# EAGLE board CT_schematic (EAGLE 7.6.0)

Size 100 x 80 mm. Coordinates in mm from the lower left corner, seen from the top.
Outline: 0,0 100,0 100,80 0,80 0,0
Copper layers (1*16): Top 0.035mm / dielectric 1.5mm / Bottom 0.035mm
Design rules "default": minimum track width 10mil, minimum drill 24mil, track to track 8mil, track to pad 8mil, pad to pad 8mil, via to via 8mil, smd to smd 8mil, copper to edge 40mil, drill to drill 8mil, minimum pad ring 10mil, minimum via ring 8mil, stop-mask expansion 4mil, vias tented up to drill 0mil, thermal gap 10mil

## Footprints (pad centres in the part's own frame; a part is rotated, then mirrored left to right if it is on the bottom)
C0603 = smd 0.8 x 0.8: 1 -0.762,0; 2 0.762,0
C0402 = smd 0.5 x 0.5: 1 -0.508,0; 2 0.508,0
C1210 = smd 1.2 x 2.5: 1 -1.524,0; 2 1.524,0
C1206 = smd 1.3 x 1.6: 1 -1.524,0; 2 1.524,0
R0603 = smd 0.8 x 0.8: 1 -0.762,0; 2 0.762,0
TSSOP14 = smd 0.35 x 1: 1 -1.95,-2.825; 2 -1.3,-2.825; 3 -0.65,-2.825; 4 0,-2.825; 5 0.65,-2.825; 6 1.3,-2.825; 7 1.95,-2.825; 8 1.95,2.825; 9 1.3,2.825; 10 0.65,2.825; 11 0,2.825; 12 -0.65,2.825; 13 -1.3,2.825; 14 -1.95,2.825
ABS07-32.768KHZ-7-T = smd 1.1 x 2.4: 1 -2.5,0; 2 0,0
ASFL1 = smd 1.7 x 1.5: 1 -1.27,-1.1; 2 1.27,-1.1; 3 1.27,1.1; 4 -1.27,1.1
SOIC-8_EP = smd 1.6 x 0.533: 1 -2.921,1.905; 2 -2.921,0.635; 3 -2.921,-0.635; 4 -2.921,-1.905; 5 2.921,-1.905; 6 2.921,-0.635; 7 2.921,0.635; 8 2.921,1.905 | smd 2.54 x 3.302: EPAD 0,0 | drill 0.406 pad 0.406: P$1 -0.508,0.635; P$2 0.381,0.635; P$3 -0.508,-0.635; P$4 0.381,-0.635
DFN8_2X3MC = smd 0.813 x 0.305: 1 -1.398,0.75; 2 -1.398,0.25; 3 -1.398,-0.25; 4 -1.398,-0.75; 5 1.398,-0.75; 6 1.398,-0.25; 7 1.398,0.25; 8 1.398,0.75 | smd 1.753 x 1.549: 9 0,0
JST-2-SMD = smd 1 x 4.6: 1 -1,-3.7; 2 1,-3.7 | smd 1.6 x 3.4: NC1 -3.4,1.5; NC2 3.4,1.5
FCI_10118193-0001LF = smd 0.4 x 1.35: 1 -1.3,2.675; 2 -0.65,2.675; 3 0,2.675; 4 0.65,2.675; 5 1.3,2.675 | smd 1.6 x 1.4: 6 -3.2,2.45; 7 3.2,2.45 | smd 1.9 x 1.9: 8 -1.2,0; 9 1.2,0 | hole 0.5: -3.3,0; 3.3,0
SON-6 = smd 0.55 x 0.3: 1 -0.355,0.5 | smd 0.52 x 0.3: 2 -0.37,0; 3 -0.37,-0.5; 4 0.37,-0.5; 5 0.37,0; 6 0.37,0.5
SW_4-1437565-2 = smd 1.4 x 2.1: 1 -2.23,4.55; 2 -2.23,-4.55; 3 2.23,4.55; 4 2.23,-4.55
LGM67K-G1J2-24-Z = smd 0.8 x 1.4: A -2,0; C 0,0
NC7SZ125M5X = smd 1.3 x 0.7: 1 -1.3,0.95; 2 -1.3,0; 3 -1.3,-0.95; 4 1.3,-0.95; 5 1.3,0.95
DUMMY_PACKAGE_85 = drill 0.3: 1 0,-1; 2 1.5,-1; 3 3,-1

## Placement (x,y rotation side)
C1  1e-07  [C0603]  -27.94,44.45 0 top  (outside the outline)
C2  1e-07  [C0603]  -31.75,44.45 0 top  (outside the outline)
C3  1e-07  [C0603]  -35.56,44.45 0 top  (outside the outline)
C4  1e-07  [C0603]  -39.37,44.45 0 top  (outside the outline)
C5  4.7e-06  [C0603]  -24.13,44.45 0 top  (outside the outline)
C6  1e-11  [C0402]  -26.67,49.53 0 top  (outside the outline)
C7  1e-11  [C0402]  -30.48,49.53 0 top  (outside the outline)
C8  1e-08  [C0402]  -34.29,49.53 0 top  (outside the outline)
C9  1e-05  [C1210]  -16.51,33.02 0 top  (outside the outline)
C10  1e-05  [C1210]  -22.86,33.02 0 top  (outside the outline)
C11  1e-05  [C1210]  -29.21,33.02 0 top  (outside the outline)
C12  1e-05  [C1210]  -35.56,33.02 0 top  (outside the outline)
C13  1e-07  [C0402]  -38.1,49.53 0 top  (outside the outline)
C14  1e-05  [C1206]  -41.91,33.02 0 top  (outside the outline)
C15  1e-05  [C1206]  -48.26,33.02 0 top  (outside the outline)
C16  1e-08  [C0402]  -41.91,49.53 0 top  (outside the outline)
R1  10000.0  [R0603]  -40.64,38.1 0 top  (outside the outline)
R2  1000.0  [R0603]  -43.18,44.45 0 top  (outside the outline)
R3  1600.5  [R0603]  -46.99,44.45 0 top  (outside the outline)
R4  4700.0  [R0603]  -50.8,44.45 0 top  (outside the outline)
R5  10000.0  [R0603]  -45.72,38.1 0 top  (outside the outline)
R6  4031.5447154472  [R0603]  -25.4,38.1 0 top  (outside the outline)
R7  2200.0  [R0603]  -15.24,49.53 0 top  (outside the outline)
R8  10000.0  [R0603]  -50.8,38.1 0 top  (outside the outline)
R9  10000.0  [R0603]  -15.24,44.45 0 top  (outside the outline)
R10  9100.0  [R0603]  -19.05,49.53 0 top  (outside the outline)
R11  680000.0  [R0603]  -30.48,38.1 0 top  (outside the outline)
R12  120000.0  [R0603]  -35.56,38.1 0 top  (outside the outline)
R13  2000.0  [R0603]  -22.86,49.53 0 top  (outside the outline)
R14  10000.0  [R0603]  -20.32,44.45 0 top  (outside the outline)
U1  STM32L021D4P6  [TSSOP14]  -44.45,16.51 0 top  (outside the outline)
U2  ABS07-32.768KHZ-7-T  [ABS07-32.768KHZ-7-T]  -27.94,25.4 0 top  (outside the outline)
U3  ASFL1-12MHZ-NCS  [ASFL1]  -26.67,16.51 0 top  (outside the outline)
U4  MIC5234YME  [SOIC-8_EP]  -36.83,25.4 0 top  (outside the outline)
U5  MCP73831T-2ACI/MC  [DFN8_2X3MC]  -15.24,53.34 0 top  (outside the outline)
U6  S2B-PH-SM4-TB(LF)(SN)  [JST-2-SMD]  -41.91,6.35 0 top  (outside the outline)
U7  10118193-0001LF  [FCI_10118193-0001LF]  -35.56,16.51 0 top  (outside the outline)
U8  TPS3895ADRYR  [SON-6]  -50.8,48.26 0 top  (outside the outline)
U9  4-1437565-2  [SW_4-1437565-2]  -27.94,6.35 0 top  (outside the outline)
U10  Q65110A2395  [LGM67K-G1J2-24-Z]  -45.72,25.4 0 top  (outside the outline)
U11  nc7sz125m5x  [NC7SZ125M5X]  -15.24,38.1 0 top  (outside the outline)
U12  Dummy  [DUMMY_PACKAGE_85]  -48.26,49.53 0 top  (outside the outline)

## Library data of the parts
C1-C16 R1-R14 U1-U12 = circuit_tree

## Nets
CLK_CRYSTAL_U1_2: C6.1 U1.2 U2.1
CLK_CRYSTAL_U1_3: C7.1 U1.3 U2.2
CLK_U1_5: U1.5 U3.3
GND: C1.2 C2.2 C3.2 C4.2 C5.2 C6.2 C7.2 C8.2 C9.2 C10.2 C11.2 C12.2 C13.2 C14.2 C15.2 C16.2 R2.2 R5.2 R7.2 R10.2 R12.2 R13.2 U1.9 U3.2 U4.7 U4.EPAD U5.6 U5.9 U6.2 U7.5 U7.6 U7.7 U7.8 U7.9 U8.2 U10.C U11.1 U11.3 U12.1
INPUT_USBPOWER_5V: C14.1 R14.2 U5.1 U5.2 U7.1
NET_U1_1: R5.1 U1.1
NET_U1_4: R4.1 U1.4 U11.4
NET_U1_13: R3.1 U1.13 U10.A
NET_U1_14: R1.1 U1.14 U9.3 U9.4
NET_U4_4: R6.2 R7.1 U4.4
NET_U5_5: R14.1 U5.5
NET_U5_8: R13.1 U5.8
NET_U8_1: R9.1 R10.1 U8.1
NET_U8_3: R11.2 R12.1 U8.3
NET_U8_4: R8.1 U8.4 U11.2
NET_U9_1: R2.1 U9.1 U9.2
PROC_TIM2_CH2: U1.6 U12.3
PROC_TIM2_CH3: U1.12 U12.2
VCC_S1_3V7: C9.1 C10.1 C15.1 U4.5 U4.8 U5.3 U5.4 U6.1
VCC_TIER1_3V3: C1.1 C2.1 C3.1 C4.1 C5.1 C8.1 C11.1 C12.1 C13.1 C16.1 R1.2 R3.2 R4.2 R6.1 R8.2 R9.2 R11.1 U1.10 U3.4 U4.1 U8.6 U11.5

## Tracks (layer width: path | path; a pad name or v marks a point on that pad's centre or on a via)
CLK_CRYSTAL_U1_2  (2 unrouted)
CLK_CRYSTAL_U1_3  (2 unrouted)
CLK_U1_5  (1 unrouted)
GND  (38 unrouted)
INPUT_USBPOWER_5V  (4 unrouted)
NET_U1_1  (1 unrouted)
NET_U1_4  (2 unrouted)
NET_U1_13  (2 unrouted)
NET_U1_14  (3 unrouted)
NET_U4_4  (2 unrouted)
NET_U5_5  (1 unrouted)
NET_U5_8  (1 unrouted)
NET_U8_1  (2 unrouted)
NET_U8_3  (2 unrouted)
NET_U8_4  (2 unrouted)
NET_U9_1  (2 unrouted)
PROC_TIM2_CH2  (1 unrouted)
PROC_TIM2_CH3  (1 unrouted)
VCC_S1_3V7  (7 unrouted)
VCC_TIER1_3V3  (21 unrouted)